# Altium PCB MCU.PcbDoc (part 1 of 2)
Units mm, origin at the board's own origin, x right, y up, seen from the top; angles counter-clockwise.
Board outline 44.5 x 17 mm, 2 copper layers (Top Layer, Bottom Layer), stack 0.871 mm thick; 54 components, 45 nets, 248 pads, 179 vias.
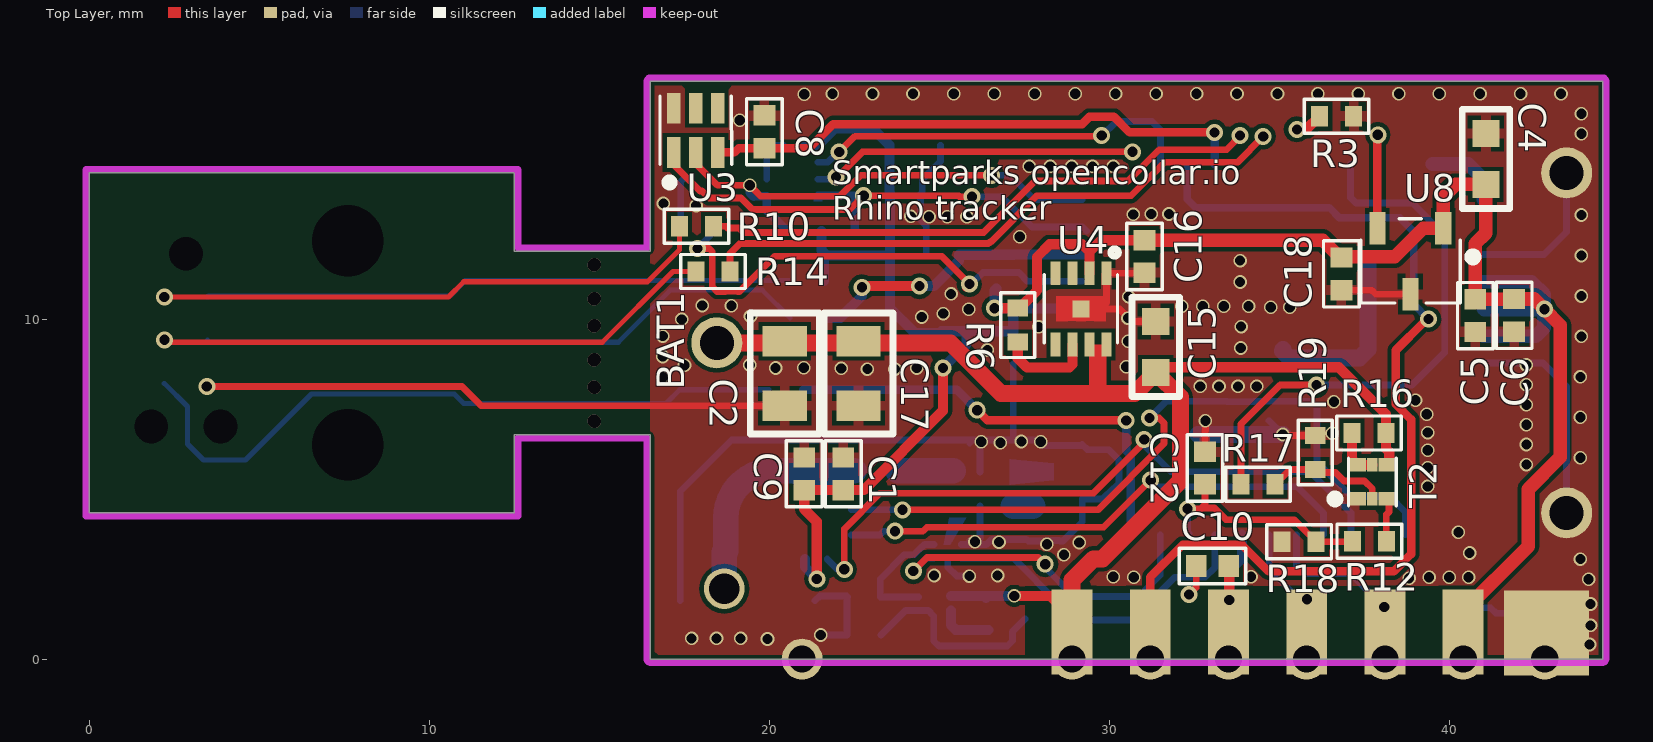
[diagram p0: Top Layer view]
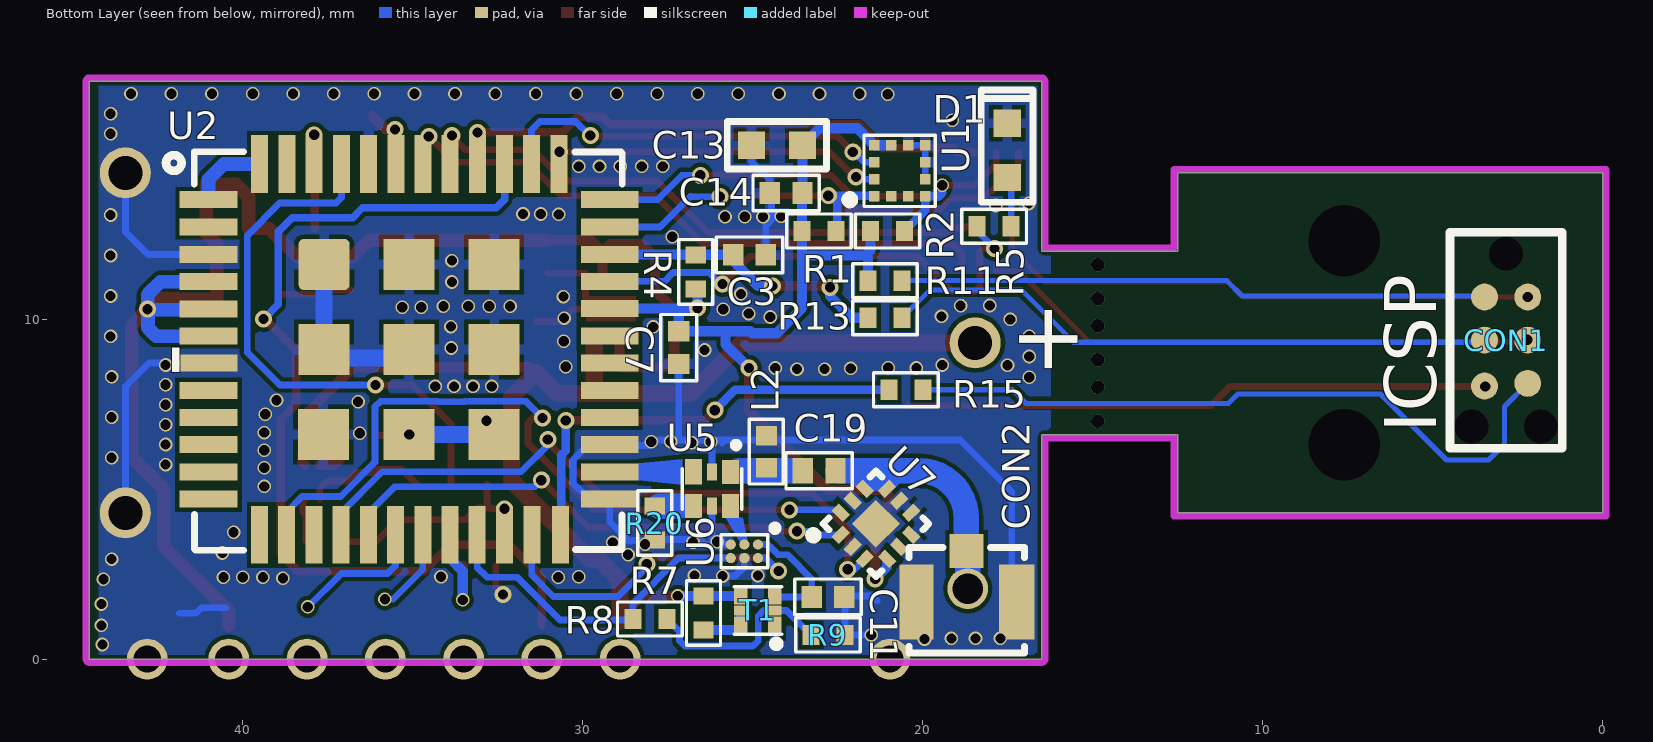
[diagram p1: Bottom Layer view, seen from below]

## Layer stack, top to bottom
Top Solder: solder mask 0.0102, Solder Resist, Dk 3.5
Top Layer: signal copper 0.0356
Dielectric 1: dielectric 0.8, FR-4, Dk 4.8
Bottom Layer: signal copper 0.0356
Bottom Solder: solder mask 0.0102, Solder Resist, Dk 3.5

## Board outline
16.5,0 16.5,4 16.5,5.6 16.5,5.8 16.5,6.6 12.5,6.6 12.5,4.3 0,4.3 0,14.3 12.5,14.3 12.5,12 16.5,12 16.5,12.7 16.5,17 44.5,17 44.5,0

## Design rules (kind name [scope] priority, off if disabled: settings)
Clearance [All] p1: gap=0.127 ignorepadtopadclearanceinfootprint=FALSE
ComponentClearance [All] p1: gap=0.05 collisioncheckmode=3 verticalgap=0.05 showdistances=FALSE
HoleToHoleClearance [All] p1: gap=0.127 allowstackedmicrovias=TRUE
MinimumSolderMaskSliver [All] p1: minsoldermaskwidth=0.05
PolygonConnect [All] p1: thpad.connectstyle=Direct thpad.reliefconductorwidth=0.254 thpad.reliefentries=4 thpad.polygonreliefangle="90 Angle" thpad.airgapwidth=0.254 smdpad.connectstyle=Relief smdpad.reliefconductorwidth=0.3 smdpad.reliefentries=4 smdpad.polygonreliefangle="90 Angle" smdpad.airgapwidth=0.127 via.connectstyle=Direct via.reliefconductorwidth=0.254 via.reliefentries=4 via.polygonreliefangle="90 Angle" via.airgapwidth=0.254
RoutingVias [All] p1: holewidth=0.3 width=0.5 viastyle="Through Hole" minholewidth=0.3 minwidth=0.1 maxholewidth=0.711 maxwidth=1.27
SilkToSilkClearance [All] p1: silktosilkclearance=-10
SilkToSolderMaskClearance [IsPad] p1: minsilkscreentomaskgap=-10 clearancetoexposedcopper=TRUE
SolderMaskExpansion [All] p1: expansion=0.102
Width [All] p1: maxlimit=5 minlimit=0.15 preferedwidth=0.3
25 further rules are at their usual default settings.

## Classes and differential pairs
component class SENSORS: C8 C13 C14 C18 U1 U3 U8
component class MCU: C3 C4 C5 C6 C7 C10 C11 C15 C16 R3 R4 R6 R7 R8 R9 R20 T1 U2 U4 U5 U6
component class MAIN: BAT1 C1 C2 C9 C12 C17 C19 CON1 CON2 D1 L2 R1 R2 R5 R10 R11 R12 R13 R14 R15 R16 R17 R18 R19 T2 U7

## Components (designator, comment, footprint, x,y, rotation, side; value= is the part's Value field where it differs from the comment)
BAT1 "SAFT LS 14250PFR" "SAFT LS 14250PFR" 43.7,9.3 r180 top locked
C1 "100uF" CAP0805 22.62,8.4 r90 top
C2 "100uF" CAP0805 20.45,8.4 r90 top
C3 "100nF" CAP0402#1 25.09,11.89 r0 bottom
C4 "10uF" CAP0603 41.07,14.71 r270 top
C5 "1uF" CAP0402#1 40.76,10.1 r90 top
C6 "100nF" CAP0402#1 41.9,10.11 r90 top
C7 "1uF" CAP0402#1 27.17,9.16 r90 bottom
C8 "1uF" CAP0402#1 19.85,15.51 r90 top
C9 "100nF" CAP0402#1 21.02,5.45 r270 top
C10 "10nF" CAP0402#1 33.03,2.74 r0 top
C11 "100nF" CAP0402#1 22.78,1.83 r180 bottom
C12 "10nF" CAP0402#1 32.81,5.62 r270 top
C13 "10uF" CAP0603 24.28,15.11 r0 bottom
C14 "100nF" CAP0402#1 24.01,13.71 r180 bottom
C15 "4u7/16V" CAP0603 31.36,9.18 r270 top
C16 "2.2uF 6V3" CAP0402#1 31.03,11.84 r90 top
C17 "1uF" CAP0402#1 22.17,5.45 r270 top
C18 "1uF" CAP0402#1 36.82,11.33 r270 top
C19 "1.2pF" CAP0402#2 23.04,5.54 r180 bottom
CON1 "Tag connect" TC2030-IDC-NL 2.835,11.92 r270 bottom locked
CON2 "U.FL-R-SMT-1(10)" "ufl connector smd" 18.85,1.93 r180 bottom
D1 "LED RED" LED0603 17.51,14.96 r270 bottom
L2 "4.7nH" IND0402 24.59,6.1 r270 bottom
R1 "10k" RES0402 23.04,12.59 r0 bottom
R2 "10k" RES0402 21.03,12.59 r0 bottom
R3 "10k" RES0402 36.68,15.97 r0 top
R4 "10k" RES0402 26.67,11.39 r270 bottom
R5 "100R" RES0402 17.89,12.73 r180 bottom
R6 "0R" RES0402 27.3,9.82 r90 top
R7 "100k" RES0402 26.44,1.36 r90 bottom
R8 "100R" RES0402 28.02,1.18 r180 bottom
R9 "100k" RES0402 22.78,0.71 r0 bottom
R10 "100R" RES0402 17.85,12.73 r0 top
R11 "100R" RES0402 21.1,11.13 r180 bottom
R12 "220R" RES0402 37.64,3.47 r0 top
R13 "100R" RES0402 21.1,10.04 r180 bottom
R14 "100R" RES0402 18.34,11.4 r0 top
R15 "100R" RES0402 20.49,7.92 r0 bottom
R16 "100k" RES0402 37.63,6.65 r0 top
R17 "100R" RES0402 34.37,5.14 r0 top
R18 "390R" RES0402 35.58,3.45 r0 top
R19 "100k" RES0402 36.05,6.08 r270 top
R20 "50R" RES0402 27.88,4 r90 bottom
T1 "VT6M1T2CR" VMT6#1 24.84,1.43 r90 bottom value=BSS123
T2 "VT6M1T2CR" VMT6#2 37.73,5.21 r0 top value=BSS123
U1 "LIS2DW12TR" LGA-12 20.67,14.36 r90 bottom
U2 "CMWX1ZZABZ" "Lora Module ES0" 34.76,9.135 r180 bottom
U3 "APDS-9306-065" APDS-9306 17.83,15.55 r0 top
U4 "MCP1810T" VDFN_2x2 29.16,10.3 r180 top
U5 "HHM22106C1" HHM22106C1 26.19,5.005 r0 bottom
U6 "LMH2110TMX" DSBGA-6 25.24,3.17 r270 bottom locked
U7 "PE64102" QFN-12 21.37,3.98 r225 bottom
U8 "DRV5032FBDBZR" SOT23-3AL 38.85,11.7 r270 top

## Footprints (in the part's own frame and the unit in brackets; to place one, negate y for a bottom-side part, rotate by r counter-clockwise, add the part's x,y. Pads: shape width x height; smd on the part's side, far side on the other; paste and mask are expansions set on the pad)
APDS-9306 [mm]
  rect 0.4x0.9 smd: 1(-0.65,-0.65) 2(0,-0.65) 3(0.65,-0.65) 4(0.65,0.65) 5(0,0.65) 6(-0.65,0.65)
  silkscreen extent -1.05,-1.64 1.06,1, body extent -1,-1 1,1, height 0.66
CAP0402#1 [mm] "Chip Capacitor, 2-Leads, Body 1.00x0.50mm, IPC Medium Density"
  rect 0.6x0.64 smd: 1(-0.48,0) 2(0.48,0)
  silkscreen extent -0.97,-0.53 0.97,0.53, body extent -0.55,-0.3 0.55,0.3, height 0.45
CAP0402#2 [mm] "Chip Capacitor, 2-Leads, Body 1.00x0.50mm, IPC Medium Density"
  rect 0.6x0.75 smd: 1(-0.48,0) 2(0.48,0)
  silkscreen extent -0.97,-0.53 0.97,0.53, body extent -0.55,-0.3 0.55,0.3, height 0.45
CAP0603 [mm]
  rect 0.8x0.8 smd: 1(-0.75,0) 2(0.75,0)
  silkscreen extent -1.46,-0.7 1.46,0.7, body extent -0.8,-0.4 0.8,0.4, height 0.9
CAP0805 [mm]
  rect 0.9x1.3 smd: 1(-0.95,0) 2(0.95,0)
  silkscreen extent -1.78,-1.02 1.78,1.02, body extent -1,-0.6 1,0.6, height 1.5
DSBGA-6 [mm]
  round 0.3 smd paste-0.05 mask+0.03: A1(-0.2,0.4) A2(0.2,0.4) B1(-0.2,0) B2(0.2,0) C1(-0.2,-0.4) C2(0.2,-0.4)
  silkscreen extent -0.77,-0.69 0.48,1, body extent -0.44,-0.61 0.44,0.61, height 0.61
HHM22106C1 [mm]
  rect 0.5x0.712 smd mask+0.05: 1(-0.55,-0.5) 4(0.55,0.5) 6(-0.55,0.5)
  rect 0.3x0.5 smd: 2(0,-0.5) 5(0,0.5)
  rect 0.5x0.75 smd mask+0.05: 3(0.55,-0.5)
  silkscreen extent -0.87,-1.37 0.87,0.6, body extent -0.85,-0.47 0.85,0.47, height 0.71
IND0402 [mm] "Chip Inductor, 2-Leads, Body 1.00x0.50mm, IPC Medium Density"
  rect 0.57x0.62 smd: 1(-0.47,0) 2(0.47,0)
  silkscreen extent -0.95,-0.5 0.95,0.5, body extent -0.53,-0.28 0.53,0.28, height 0.55
LED0603 [mm]
  rect 0.8x0.8 smd: 1(-0.8,0) 2(0.8,0)
  silkscreen extent -1.78,-0.76 1.52,0.76, body extent -0.85,-0.4 0.85,0.4, height 0.66
LGA-12 [mm]
  rect 0.3x0.3 smd mask+0.075: 1(-0.75,0.75) 2(-0.75,0.25) 3(-0.75,-0.25) 4(-0.75,-0.75) 5(-0.25,-0.75) 6(0.25,-0.75) 7(0.75,-0.75) 8(0.75,-0.25) 9(0.75,0.25) 10(0.75,0.75) 11(0.25,0.75) 12(-0.25,0.75)
  Top Layer region: -0.615,0.875 -0.89,0.875 -0.89,0.625 -0.703,0.625 -0.615,0.713
  silkscreen extent -1.05,-1.05 1.05,1.59, body extent -1,-1 1,1, height 0.95
"Lora Module ES0" [mm]
  rect 1.7x0.5 smd paste-5: 1(-6.24,4.375) 2(-6.24,3.575) 3(-6.24,2.765) 4(-6.24,1.965) 5(-6.24,1.165) 6(-6.24,0.365) 7(-6.24,-0.425) 8(-6.24,-1.235) 9(-6.24,-2.035) 10(-6.24,-2.825) 11(-6.24,-3.635) 12(-6.24,-4.425) 25(5.562,-4.43) 26(5.562,-3.629) 27(5.562,-2.827) 28(5.562,-2.03) 29(5.562,-1.23) 30(5.562,-0.43) 31(5.56,0.365) 32(5.56,1.175) 33(5.56,1.975) 34(5.56,2.765) 35(5.56,3.575) 36(5.56,4.375)
  rect 0.5x1.7 smd paste-5: 13(-4.74,-5.48) 14(-3.938,-5.48) 15(-3.138,-5.48) 16(-2.338,-5.48) 17(-1.538,-5.48) 18(-0.738,-5.48) 19(0.062,-5.48) 20(0.862,-5.479) 21(1.662,-5.479) 22(2.462,-5.48) 23(3.269,-5.48) 24(4.11,-5.48) 37(4.07,5.425) 38(3.26,5.425) 39(2.47,5.425) 40(1.67,5.425) 41(0.87,5.425) 42(0.07,5.425) 43(-0.73,5.425) 44(-1.53,5.425) 45(-2.33,5.425) 46(-3.13,5.425) 47(-3.93,5.425) 48(-4.74,5.425)
  rrect20% 1.5x1.5 smd paste-0.15: 49(-2.838,2.47)
  rect 1.5x1.5 smd paste-0.15: 50(-0.338,2.47) 51(2.162,2.47) 52(-2.838,-0.03) 53(-0.338,-0.03) 54(2.162,-0.03) 55(-2.863,-2.53) 56(-0.338,-2.53) 57(2.162,-2.53)
  silkscreen extent -7.49,-5.94 5.93,5.78, body extent -6.63,-5.88 5.87,5.72, height 1.76
QFN-12 [mm]
  rect 1x1 smd paste-0.15 mask+0.075: 0(0,0)
  rect 0.3x0.475 smd paste-0.025 mask+0.05: 1(-0.5,-0.962) 2(0,-0.962) 3(0.5,-0.962) 7(0.5,0.962) 8(0,0.962) 9(-0.5,0.962)
  rect 0.475x0.3 smd paste-0.025 mask+0.05: 4(0.963,-0.5) 5(0.963,0) 6(0.963,0.5) 10(-0.962,0.5) 11(-0.962,0) 12(-0.962,-0.5)
  silkscreen extent -1.17,-1.65 1.1,1.1, body extent -1,-1.01 1.01,1.01, height 0.61
RES0402 [mm] "Chip Resistor, 2-Leads, Body 1.00x0.50mm, IPC Medium Density"
  rect 0.5x0.6 smd: 1(-0.5,0) 2(0.5,0)
  silkscreen extent -0.95,-0.5 0.95,0.5, body extent -0.5,-0.25 0.5,0.25, height 0.35
"SAFT LS 14250PFR" [mm]
  round 1.5 hole 1: 1(0.254,5) 1(0.254,-5) 2(25.25,0)
  body extent 0.13,-7.26 25.38,7.24, height 16.45
SOT23-3AL [mm]
  rect 0.95x0.48 smd: 1(-0.97,0.97) 2(-0.97,-0.97) 3(0.97,0)
  silkscreen extent -1.25,-1.46 1.23,1.96, body extent -1.25,-1.46 1.23,1.46, height 0.95
TC2030-IDC-NL [mm] "Tag-Connect 6-Pin with No Legs (PN# TC2030-IDC-NL)"
  round 0.9 hole 0.995 unplated: 0(0,0) 0(5.08,-1.016) 0(5.08,1.016)
  round 0.79 smd paste-0.39: 1(1.27,-0.635) 2(1.27,0.635) 3(2.54,-0.635) 4(2.54,0.635) 5(3.89,-0.635) 6(3.81,0.635)
  silkscreen extent -0.64,-1.65 5.71,1.65
"ufl connector smd" [mm]
  rect 1x1 smd: 1(0.15,1.248)
  rect 1x2.2 smd: 2(-1.325,-0.252)
  rect 1.05x2.2 smd: 2(1.625,-0.252)
  silkscreen extent -1.55,-1.75 1.85,1.35, body extent -1.55,-1.67 1.85,1.43, height 1.25
VDFN_2x2 [mm]
  rect 0.5x0.5 smd: 0(0,0)
  rect 0.3x0.7 smd mask+0.075: 1(-0.75,-1.05) 2(-0.25,-1.05) 3(0.25,-1.05) 4(0.75,-1.05) 5(0.75,1.05) 6(0.25,1.05) 7(-0.25,1.05) 8(-0.75,1.05)
  Top Layer region: 0.73,-0.37 0.731,0.37 -0.725,0.37 -0.725,-0.37
  silkscreen extent -1.07,-1 1.08,1, body extent -1,-1 1,1.01, height 0.86
VMT6#1 [mm]
  rect 0.5x0.4 smd paste-0.07 mask+0.04: 1(-0.43,-0.5) 3(0.43,-0.5) 4(0.43,0.5) 6(-0.43,0.5)
  rect 0.3x0.4 smd mask+0.05: 2(0,-0.5) 5(0,0.5)
  silkscreen extent -1.07,-0.7 0.7,0.7, body extent -0.6,-0.6 0.6,0.6, height 0.55
VMT6#2 [mm]
  rect 0.5x0.4 smd paste-0.07 mask+0.025: 1(-0.43,-0.5) 3(0.43,-0.5) 4(0.43,0.5) 6(-0.43,0.5)
  rect 0.3x0.4 smd mask+0.05: 2(0,-0.5) 5(0,0.5)
  silkscreen extent -1.22,-0.7 0.7,0.7, body extent -0.6,-0.6 0.6,0.6, height 0.55

## Part data
BAT1: library part "BAT - SAFT LS 14250PFR", "Battery: lithium; 3.6V; 1/2AA; 3pin,positive pole: 1pin; 1200mAh", Supplier Part Number 1=SAFT-LS14250PFR, Supplier 1=TME
C1 C2: library part "C - 100uF/0805", "Multilayer Ceramic Capacitors MLCC - SMD/SMT 0805 100uF 4volts *Derate Voltage/Temp", Case/Package=0805, Case Code (Metric)=2012, Dielectric=X5R, Dielectric Material=Ceramic, IRNAS Part No.=/, Manufacturer=Murata, Manufacturer Part Number=GRM21BR60G107ME15L, Max Operating Temperature=85°C, Min Operating Temperature=-55°C, Package Quantity=3000, Supplier Part Number 1=2611937, Tolerance=20%, Voltage=4V, Capacitance=100uF, Case Code (Imperial)=0805, ComponentLink1Description=http://www.farnell.com/datasheets/2079181.pdf, ComponentLink1URL=http://www.farnell.com/datasheets/2079181.pdf, ComponentLink2Description=http://search.murata.co.jp/Ceramy/image/img/A01X/partnumbering_e_01.pdf, ComponentLink2URL=http://search.murata.co.jp/Ceramy/image/img/A01X/partnumbering_e_01.pdf, ComponentLink3Description=http://psearch.en.murata.com/capacitor/product/GRM21BR60G107ME15%23.pdf, ComponentLink3URL=http://psearch.en.murata.com/capacitor/product/GRM21BR60G107ME15%23.pdf, ComponentLink4Description=http://www.mouser.com/ds/2/281/c02e-2905.pdf, ComponentLink4URL=http://www.mouser.com/ds/2/281/c02e-2905.pdf, Depth=1.25mm, Dissipation Factor=0.1%, Height=1.25mm, Lead Free="Lead Free", Length=2mm, Mount="Surface Mount", Packaging="Tape and Reel", Pricing 1="5=0.775, 50=0.463, 250=0.405, 500=0.289, 1500=0.243, 3000=0.229, 15000=0.21 (GBP)", REACH SVHC="No SVHC", Stock 1=529, Supplier 1=Farnell, Termination=SMD/SMT, Thickness=0.057inch, Voltage Rating=4V, Voltage Rating (DC)=4V, Weight=0.000335oz, Width=0.049inch
C3 C6 C9 C11 C14: library part "C - 100nF/0402", "MULTICOMP         MC0402X104J160CT             SMD Multilayer Ceramic Capacitor, 0402 [1005 Metric], 0.1 F, 16 V,  5%, X5R, MC Series                          New", Case Code (Imperial)=0402, Case Code (Metric)=1005, Dielectric=X5R, IRNAS Part No.=/, Manufacturer=Multicomp, Manufacturer Part Number=MC0402X104J160CT, Max Operating Temperature=85°C, Min Operating Temperature=-55°C, Supplier Part Number 1=2627419, Tolerance=5%, Voltage Rating=16V, Capacitance=100nF, ComponentLink1Description=http://www.farnell.com/datasheets/2117933.pdf, ComponentLink1URL=http://www.farnell.com/datasheets/2117933.pdf, ComponentLink2Description=http://www.farnell.com/datasheets/2117900.pdf, ComponentLink2URL=http://www.farnell.com/datasheets/2117900.pdf, Packaging="Tape and Reel", Pricing 1="10=0.0139, 100=0.0108, 500=0.0076, 2500=0.0051, 5000=0.0038 (EUR)", REACH SVHC="No SVHC", Stock 1=3230, Supplier 1=Farnell, Voltage Rating (DC)=16V
C4: "10uf/0603/20%", Manufacturer=KEMET, Manufacturer Part Number=C0603C106M8PACTU, Supplier Part Number 1=2456110, Pricing 1="10=0.555, 100=0.315, 500=0.238, 1000=0.2, 2000=0.174, 4000=0.143, 20000=0.123 (GBP)", Stock 1=0, Supplier 1=Farnell
C5 C7 C8 C17 C18: library part "C - 1uF/0402", "CAP CER 1UF 10V 20% X5R 0402", Case/Package=0402, Case Code (Metric)=1005, Dielectric=X5R, IRNAS Part No.=/, Manufacturer=Murata, Manufacturer Part Number=GRM155R61A105ME15D, Max Operating Temperature=85°C, Min Operating Temperature=-55°C, Package Quantity=1, Supplier Part Number 1=1740588, Tolerance=20%, Voltage=10V, Capacitance=1uF, Case Code (Imperial)=0402, ComponentLink1Description=https://datasheet.ciiva.com/164/product-164665.pdf, ComponentLink1URL=https://datasheet.ciiva.com/164/product-164665.pdf, ComponentLink2Description=https://datasheet.ciiva.com/11616/product-11616508.pdf, ComponentLink2URL=https://datasheet.ciiva.com/11616/product-11616508.pdf, ComponentLink3Description=https://datasheet.ciiva.com/46418/1769893-46418047.pdf, ComponentLink3URL=https://datasheet.ciiva.com/46418/1769893-46418047.pdf, ComponentLink4Description=https://datasheet.ciiva.com/164/partnumbering-e-01-164666.pdf, ComponentLink4URL=https://datasheet.ciiva.com/164/partnumbering-e-01-164666.pdf, ComponentLink5Description=https://datasheet.ciiva.com/164/partnumbering-e-01-164667.pdf, ComponentLink5URL=https://datasheet.ciiva.com/164/partnumbering-e-01-164667.pdf, Depth=0.5mm, Height=0.5mm, Lead Free="Lead Free", Length=1mm, Mount="Surface Mount", Packaging="Tape and Reel", Pricing 1="10=0.0379, 100=0.0266, 500=0.0156, 2500=0.0098, 5000=0.0083 (EUR)", Radiation Hardening=No, REACH SVHC="No SVHC", Stock 1=0, Supplier 1=Farnell, Thickness=0.022inch, Voltage Rating=10V, Voltage Rating (DC)=10V, Width=0.02inch
C10 C12: library part "C - 10nF/0402", "CAP CER 10000PF 16V X7R 0402", Case/Package=0402, Case Code (Metric)=1005, Dielectric=X7R, IRNAS Part No.=/, Manufacturer=Murata, Manufacturer Part Number=GRM155R71C103KA01D, Max Operating Temperature=125°C, Min Operating Temperature=-55°C, Package Quantity=1, Supplier Part Number 1=2407354, Tolerance=10%, Voltage=16V, Capacitance=10nF, Case Code (Imperial)=0402, ComponentLink1Description=https://datasheet.ciiva.com/129/partnumbering-e-01-129774.pdf, ComponentLink1URL=https://datasheet.ciiva.com/129/partnumbering-e-01-129774.pdf, ComponentLink2Description=https://datasheet.ciiva.com/129/partnumbering-e-01-129775.pdf, ComponentLink2URL=https://datasheet.ciiva.com/129/partnumbering-e-01-129775.pdf, ComponentLink3Description=https://datasheet.ciiva.com/129/product-129776.pdf, ComponentLink3URL=https://datasheet.ciiva.com/129/product-129776.pdf, ComponentLink4Description=https://datasheet.ciiva.com/18184/getdatasheetpartid-178863-18184649.pdf, ComponentLink4URL=https://datasheet.ciiva.com/18184/getdatasheetpartid-178863-18184649.pdf, ComponentLink5Description=https://datasheet.ciiva.com/22698/608985-22698415.pdf, ComponentLink5URL=https://datasheet.ciiva.com/22698/608985-22698415.pdf, ComponentLink6Description=https://datasheet.ciiva.com/7937/608985-7937614.pdf, ComponentLink6URL=https://datasheet.ciiva.com/7937/608985-7937614.pdf, Depth=0.5mm, Height=0.5mm, Lead Free="Lead Free", Length=1mm, Mount="Surface Mount", Number of Pins=2, Packaging="Tape and Reel", Pricing 1="10=0.0216, 100=0.0151, 500=0.0104, 2500=0.0069, 5000=0.0056 (EUR)", Radiation Hardening=No, REACH SVHC="No SVHC", Stock 1=16478, Supplier 1=Farnell, Termination=SMD/SMT, Thickness=0.022inch, Voltage Rating=16V, Voltage Rating (DC)=16V, Width=0.02inch
C13: library part "C - 10uF/10V", "Cap Ceramic 10uF 10V X5R 10% SMD 0603 85C Paper T/R", Case/Package=0603, Case Code (Metric)=1608, Dielectric=X5R, IRNAS Part No.=/, Manufacturer=Samsung, Manufacturer Part Number=CL10A106KP8NNNC, Max Operating Temperature=85°C, Min Operating Temperature=-55°C, Package Quantity=1, Supplier Part Number 1=2456110, Tolerance=10%, Voltage Rating=10V, Capacitance=10uF, Case Code (Imperial)=0603, ComponentLink1Description=https://www.verical.com/server-webapp/html/getDatasheet?partID=359551, ComponentLink1URL=https://www.verical.com/server-webapp/html/getDatasheet?partID=359551, ComponentLink2Description=http://www1.futureelectronics.com/doc/SAMSUNG%20PASSIVE/CL05B104KQ5NNNC.pdf, ComponentLink2URL=http://www1.futureelectronics.com/doc/SAMSUNG%20PASSIVE/CL05B104KQ5NNNC.pdf, ComponentLink3Description=https://produktinfo.conrad.com/datenblaetter/450000-474999/457369-da-01-en-VS_KONDENSATOR_0603.pdf, ComponentLink3URL=https://produktinfo.conrad.com/datenblaetter/450000-474999/457369-da-01-en-VS_KONDENSATOR_0603.pdf, Contact Plating=Tin, Depth=0.8mm, Height=0.8mm, Lead Free="Lead Free", Length=1.6mm, Material=Ceramic, Mount="Surface Mount", Packaging="Tape and Reel", Pricing 1="1=0.36, 10=0.248, 100=0.1403, 500=0.099, 1000=0.08663 (USD)", Radiation Hardening=No, Stock 1=2844657, Supplier 1=Farnell, Thickness=0.035inch, Voltage Rating (DC)=10V, Width=0.031inch
C15: library part "C - 4u7  16V 0603", "MURATA - GRM188R61C475KAAJD - CAP, MLCC, X5R, 4.7UF, 16V, 0603", Capacitance=4.7, Capacitance Tolerance="± 10%", Ceramic Capacitor Case="0603 [1608 Metric]", Dielectric Characteristic=X5, IRNAS Part No.=I-200001, Manufacturer=MURATA, Manufacturer Part Number=GRM188R61C475KAAJD, Operating Temperature Max=85, Operating Temperature Min=-55, Supplier Part Number 1=2611924, Voltage Rating=16, Automotive Qualification Standard=-, ComponentLink1Description=http://www.farnell.com/datasheets/2079168.pdf, ComponentLink1URL=http://www.farnell.com/datasheets/2079168.pdf, MSL="MSL 1 - Unlimited", Packaging="Cut Tape", Pricing 1="10=0.16, 100=0.0929, 500=0.076, 1000=0.0618, 2000=0.0605, 4000=0.0425, 20000=0.0409, 40000=0.0355 (GBP)", Product Range="GRM Series", RoHS=YES, Stock 1=5038, Supplier 1=Farnell, SVHC="No SVHC (17-Dec-2015)<!--FANDB--><div class=\"features-and-benefits-container\"><div class=\"features-and-benefits-desc-container\"><span class=\"features-and-benefits-container-desc\">SMD Multilayer Ceramic Capacitor, 0603 [1608 Metric], 4.7 µF, 16 V, ± 10%, X5"
C16: library part "C - 2.2uF/6V3/0402", "CAP CER 2.2UF 6.3V 20% X5R 0402", Capacitance=2.2uF, Case/Package=0402, Case Code (Metric)=1005, Dielectric=X5R, IRNAS Part No.=/, Manufacturer=Murata, Manufacturer Part Number=GRM155R60J225ME15D, Max Operating Temperature=85°C, Min Operating Temperature=-55°C, Package Quantity=10000, Supplier Part Number 1=2362088, Tolerance=20%, Voltage=6.3V, Case Code (Imperial)=0402, ComponentLink1Description=https://datasheet.ciiva.com/29149/450128-da-01-de-vs-kondens-grm155-r60j-225me15d-29149006.pdf, ComponentLink1URL=https://datasheet.ciiva.com/29149/450128-da-01-de-vs-kondens-grm155-r60j-225me15d-29149006.pdf, ComponentLink2Description=https://datasheet.ciiva.com/46418/1754686-46418042.pdf, ComponentLink2URL=https://datasheet.ciiva.com/46418/1754686-46418042.pdf, ComponentLink3Description=https://datasheet.ciiva.com/17454/c02e-17454956.pdf, ComponentLink3URL=https://datasheet.ciiva.com/17454/c02e-17454956.pdf, ComponentLink4Description=https://datasheet.ciiva.com/235/partnumbering-e-01-235009.pdf, ComponentLink4URL=https://datasheet.ciiva.com/235/partnumbering-e-01-235009.pdf, ComponentLink5Description=https://datasheet.ciiva.com/2989/c02e-2989361.pdf, ComponentLink5URL=https://datasheet.ciiva.com/2989/c02e-2989361.pdf, ComponentLink6Description=https://datasheet.ciiva.com/235/partnumbering-e-01-235010.pdf, ComponentLink6URL=https://datasheet.ciiva.com/235/partnumbering-e-01-235010.pdf, ComponentLink7Description=https://datasheet.ciiva.com/235/partnumbering-e-01-235011.pdf, ComponentLink7URL=https://datasheet.ciiva.com/235/partnumbering-e-01-235011.pdf, Depth=0.5mm, Height=0.5mm, Lead Free="Lead Free", Length=1mm, Material=Ceramic, Mount="Surface Mount", Packaging="Tape and Reel", Pricing 1="10=0.118, 100=0.0494, 500=0.031, 2500=0.0213, 5000=0.0163 (EUR)", Radiation Hardening=No, REACH SVHC="No SVHC", Stock 1=0, Supplier 1=Farnell, Termination=SMD/SMT, Thickness=0.022inch, Voltage Rating=6.3V, Voltage Rating (DC)=6.3V, Width=0.02inch
C19: library part "C - 4.7nF/0402", "CAP CER 4700PF 50V X7R 0402", Capacitance=4.7nF, Case/Package=0402, Case Code (Metric)=1005, Dielectric=X7R, Dielectric Material=Ceramic, IRNAS Part No.=/, Manufacturer=KEMET, Manufacturer Part Number=C0402C472K5RAC-TU, Max Operating Temperature=125°C, Min Operating Temperature=-55°C, Package Quantity=1, Supplier Part Number 1=1414594, Tolerance=10%, Voltage=50V, Case Code (Imperial)=0402, ComponentLink1Description=https://datasheet.ciiva.com/7747/40889-7747549.pdf, ComponentLink1URL=https://datasheet.ciiva.com/7747/40889-7747549.pdf, ComponentLink2Description=https://datasheet.ciiva.com/7747/40889-7747550.pdf, ComponentLink2URL=https://datasheet.ciiva.com/7747/40889-7747550.pdf, ComponentLink3Description=https://datasheet.ciiva.com/14604/70095383-14604382.pdf, ComponentLink3URL=https://datasheet.ciiva.com/14604/70095383-14604382.pdf, ComponentLink4Description=https://datasheet.ciiva.com/6074/kem-c1002-x7r-smd-6074645.pdf, ComponentLink4URL=https://datasheet.ciiva.com/6074/kem-c1002-x7r-smd-6074645.pdf, ComponentLink5Description=https://datasheet.ciiva.com/14602/70095383-14602057.pdf, ComponentLink5URL=https://datasheet.ciiva.com/14602/70095383-14602057.pdf, ComponentLink6Description=https://datasheet.ciiva.com/18102/getdatasheetpartid-63228-18102058.pdf, ComponentLink6URL=https://datasheet.ciiva.com/18102/getdatasheetpartid-63228-18102058.pdf, Depth=0.5mm, Height=0.5mm, Lead Pitch=0.3mm, Length=1mm, Mount="Surface Mount,PCB", Number of Pins=2, Packaging="Tape and Reel", Pricing 1="10=0.0321, 100=0.0144, 500=0.0081, 2500=0.0057, 5000=0.0048 (EUR)", Radiation Hardening=No, REACH SVHC="No SVHC", Stock 1=98953, Supplier 1=Farnell, Termination=SMD/SMT, Thickness=0.022inch, Voltage Rating=50V, Voltage Rating (DC)=50V, Width=0.02inch
CON1: library part "tag connecot 6 pin"
CON2: "RF / Coaxial Connector, U.FL Coaxial, Straight Jack, Surface Mount Vertical, 50 ohm, Brass", Dielectric Material="Liquid Crystal Polymer (LCP)", Frequency - Max=6GHz, Housing Color=Beige, Manufacturer=Hirose, Operating Temperature="-40°C ~ 90°C", Standard Package=2,500, Supplier Part Number 1=1688077, Voltage Rating=-, Body Finish=Silver, Body Material="Phosphor Bronze", Cable Group=-, Category="Connectors, Interconnects", Center Contact Material=Brass, Center Contact Plating=Gold, ComponentLink1Description=http://www.farnell.com/datasheets/91524.pdf, ComponentLink1URL=http://www.farnell.com/datasheets/91524.pdf, ComponentLink2Description=http://uk.rs-online.com/webdocs/1363/0900766b81363563.pdf, ComponentLink2URL=http://uk.rs-online.com/webdocs/1363/0900766b81363563.pdf, ComponentLink3Description=http://www.farnell.com/datasheets/1947917.pdf, ComponentLink3URL=http://www.farnell.com/datasheets/1947917.pdf, Connector Style="U.FL, Ultra Miniature Coaxial", Connector Type="Receptacle, Male Pin", Contact Termination=Solder, Family="Coaxial Connectors (RF)", Fastening Type=Snap-On, Featured Product="U.FL Series Connectors", Features=-, Impedance="50 Ohm", Ingress Protection=-, Manufacturer Part Number=U.FL-R-SMT-1(10), Mounting Type="Surface Mount", Online Catalog="UMCC (Ultra Miniature Coax Connectors), U.FL Series", Other Names="H11891TR  Q5400621  U.FL-R-SMT-1 10  U.FL-R-SMT-1(10)-ND  UFLRSMT110", Packaging="Tape & Reel (TR)", Series=U.FL, Shield Termination=Solder, Stock 1=0, Supplier 1=Farnell
D1: library part "LED - LED RED", "BROADCOM LIMITED - HSMS-C190 - LED, RED, 10MCD, 626NM", Forward Current If=20, Forward Voltage=2.1, LED Colour=Red, Manufacturer="BROADCOM LIMITED", Manufacturer Part Number=HSMS-C190, Supplier Part Number 1=2497356, Automotive Qualification Standard=-, Bulb Size=-, ComponentLink1Description=http://www.farnell.com/datasheets/313031.pdf, ComponentLink1URL=http://www.farnell.com/datasheets/313031.pdf, ComponentLink2Description=http://www.farnell.com/datasheets/1681524.pdf, ComponentLink2URL=http://www.farnell.com/datasheets/1681524.pdf, ComponentLink3Description=http://www.farnell.com/datasheets/2165483.pdf, ComponentLink3URL=http://www.farnell.com/datasheets/2165483.pdf, LED Mounting=SMD, Lens Shape=Rectangular, Luminous Intensity=10, MSL=-, Packaging="Cut Tape", Pricing 1="1=0.361, 10=0.256, 50=0.235, 100=0.106, 200=0.101 (GBP)", Product Range=-, RoHS=YES, Stock 1=7534, Supplier 1=Farnell, SVHC="No SVHC (17-Dec-2015)<!--FANDB--><div class=\"features-and-benefits-container\"><div class=\"features-and-benefits-description\"><span class=\"features-benefits-value\">The HSMS-C190 is a HER SMD Chip LED with untinted/diffused lens, made of GaP. It is designed in an industry standard package 1.6 x 0.8mm footprint with 0.8mm profile. It is compatible with IR reflow solder processes. The small size and wide viewing angle make this LED prime choices for backlighting applications and front panel illumination especially where space is a premium.</span></div><div class=\"features-and-benefits-list\"><ul class=\"features-and-benefits-list-list\"><li class=\"features-and-benefits-list-item\">Small size</li><li class=\"features-and-benefits-list-item\">Industry standard footprint</li><li class=\"features-and-benefits-list-item\">Compatible with IR solder</li><li class=\"features-and-benefits-list-item\">Diffused optics</li><li class=\"features-and-benefits-list-item\">-40 to 85", Viewing Angle=170°, Wavelength Typ=626
L2: library part "L - 4.3nH/0402", "Inductor RF Chip Multi-Layer 4.3nH 0.3nH 100MHz 8Q-Factor Air 300mA 210mOhm DCR 0402 Paper T/R", Case/Package=0402, Case Code (Metric)=1005, Current=300mA, DC Resistance (DCR)=210mR, Inductance=4.3nh, IRNAS Part No.=/, Manufacturer=Murata, Manufacturer Part Number=LQG15HN4N3S02D, Max Operating Temperature=125°C, Min Operating Temperature=-55°C, Package Quantity=10000, Self Resonant Frequency=6GHz, Supplier Part Number 1=1711735, Test Frequency=100MHz, Case Code (Imperial)=0402, ComponentLink1Description=http://uk.rs-online.com/webdocs/0f10/0900766b80f10808.pdf?src-supplier=RSComponents, ComponentLink1URL=http://uk.rs-online.com/webdocs/0f10/0900766b80f10808.pdf?src-supplier=RSComponents, ComponentLink2Description=http://search.murata.co.jp/Ceramy/image/img/PDF/ENG/L0075S0083LQG15HN.pdf?src-supplier=Avnet, ComponentLink2URL=http://search.murata.co.jp/Ceramy/image/img/PDF/ENG/L0075S0083LQG15HN.pdf?src-supplier=Avnet, ComponentLink3Description=http://www.farnell.com/datasheets/66026.pdf?src-supplier=Element14, ComponentLink3URL=http://www.farnell.com/datasheets/66026.pdf?src-supplier=Element14, ComponentLink4Description=https://www.verical.com/server-webapp/html/getDatasheet?partID=31252&src-supplier=Verical, ComponentLink4URL=https://www.verical.com/server-webapp/html/getDatasheet?partID=31252&src-supplier=Verical, ComponentLink5Description=http://search.murata.co.jp/Ceramy/image/img/PDF/ENG/L0075S0083LQG15HN.pdf?src-supplier=Avnet+Europe, ComponentLink5URL=http://search.murata.co.jp/Ceramy/image/img/PDF/ENG/L0075S0083LQG15HN.pdf?src-supplier=Avnet+Europe, ComponentLink6Description=https://search.murata.co.jp/Ceramy/image/img/P02/partnumberingAT_LQ3E.pdf?src-supplier=Digi-Key, ComponentLink6URL=https://search.murata.co.jp/Ceramy/image/img/P02/partnumberingAT_LQ3E.pdf?src-supplier=Digi-Key, Core Material=Air, Current Rating=300mA, DC Current=300mA, Depth=0.55mm, Height=0.5mm, Height - Seated (Max)=0.022inch, Lead Free="Lead Free", Length=1.05mm, Max DC Current=300mA, Military Standard=Not, Mount="Surface Mount", Packaging="Tape and Reel", Pricing 1="1 = 0.10000, 10 = 0.06100, 100 = 0.04040, 500 = 0.03366, 1000 = 0.02827, 2500 = 0.02423 (USD)", Q Factor=8, Radiation Hardening=No, REACH SVHC="No SVHC", RoHS=Yes, Shielding=Unshielded, Stock 1=3502, Supplier 1=Farnell, Termination=SMD/SMT, Width=0.02inch
R1 R2 R3 R4: library part "R - 10k/0402", "MULTICOMP         MCWR04X1002FTL             SMD Chip Resistor, Thick Film, 10 kohm, 50 V, 0402 [1005 Metric], 62.5 mW,  1%, MCWR Series", Case/Package=0402, Case Code (Metric)=1005, IRNAS Part No.=I-100014, Manufacturer=Multicomp, Manufacturer Part Number=MCWR04X1002FTL, Power Rating=62.5mW, Resistance=10kR, Supplier Part Number 1=2447096, Temperature Coefficient=100ppm/°C, Tolerance=1%, Voltage Rating=50V, Case Code (Imperial)=0402, ComponentLink1Description=http://www.farnell.com/datasheets/1849611.pdf, ComponentLink1URL=http://www.farnell.com/datasheets/1849611.pdf, Composition="Thick Film", Packaging="Cut Tape", Pricing 1="10=0.0029, 100=0.0017, 500=0.0012, 2500=0.001, 5000=0.0008 (EUR)", REACH SVHC="No SVHC", Stock 1=602609, Supplier 1=Farnell, Voltage Rating (DC)=50V
R5 R8 R10 R11 R13 R14 R15 R17: library part "R - 100R/0402", "MULTICOMP         MCMR04X1000FTL            SMD Chip Resistor, Ceramic, MCMR Series, 100 ohm, 50 V, 0402 [1005 Metric], 62.5 mW,  1%", Case/Package=0402, Case Code (Metric)=1005, IRNAS Part No.=/, Manufacturer=Multicomp, Manufacturer Part Number=MCMR04X1000FTL, Power Rating=62.5mW, Supplier Part Number 1=2072515, Temperature Coefficient=100ppm/°C, Tolerance=1%, Voltage Rating=50V, Case Code (Imperial)=0402, ComponentLink1Description=https://datasheet.ciiva.com/28692/1716705-28692087.pdf, ComponentLink1URL=https://datasheet.ciiva.com/28692/1716705-28692087.pdf, ComponentLink2Description=https://datasheet.ciiva.com/22708/1716705-22708156.pdf, ComponentLink2URL=https://datasheet.ciiva.com/22708/1716705-22708156.pdf, Composition=Ceramic, Packaging="Cut Tape", Pricing 1="10=0.0071, 100=0.0042, 500=0.003, 2500=0.0024, 5000=0.0019 (GBP)", REACH SVHC="No SVHC", Resistance=100R, Stock 1=62365, Supplier 1=Farnell, Voltage Rating (DC)=50V
R6: library part "R - 0R/0402", "RESISTOR, 0402, 0R, ANTI SULFURATION", Case/Package=0402, Case Code (Metric)=1005, IRNAS Part No.=I-100016, Manufacturer=Multicomp, Manufacturer Part Number=MCMR04X000PTL, Power Rating=62.5mW, Resistance=0mR, Supplier Part Number 1=2072513, Temperature Coefficient=400ppm/°C, Voltage Rating=50V, Case Code (Imperial)=0402, ComponentLink1Description=https://datasheet.ciiva.com/7776/1716705-7776974.pdf, ComponentLink1URL=https://datasheet.ciiva.com/7776/1716705-7776974.pdf, ComponentLink2Description=https://datasheet.ciiva.com/28677/1716705-28677161.pdf, ComponentLink2URL=https://datasheet.ciiva.com/28677/1716705-28677161.pdf, Composition=Ceramic, Packaging="Cut Tape", Pricing 1="10=0.0057, 100=0.0034, 500=0.0024, 2500=0.0019, 5000=0.0015 (EUR)", REACH SVHC="No SVHC", Stock 1=0, Supplier 1=Farnell, Voltage Rating (DC)=50V
R7 R9 R16 R19: library part "R - 100k/0402", "MULTICOMP   MCWR04X1003FTL   RES, THICK FILM, 100KOHM, 1%, 0.0625W", Case/Package=0402, Case Code (Metric)=1005, IRNAS Part No.=I-100013, Manufacturer=Multicomp, Manufacturer Part Number=MCWR04X1003FTL, Power Rating=62.5mW, Resistance=100kR, Supplier Part Number 1=2447094, Temperature Coefficient=100ppm/°C, Tolerance=1%, Voltage Rating=50V, Case Code (Imperial)=0402, ComponentLink1Description=https://datasheet.ciiva.com/46386/1849611-46386524.pdf, ComponentLink1URL=https://datasheet.ciiva.com/46386/1849611-46386524.pdf, Composition="Thick Film", Mount="Surface Mount", Packaging="Cut Tape", Pricing 1="10=0.0029, 100=0.0017, 500=0.0012, 2500=0.001, 5000=0.0008 (EUR)", REACH SVHC="No SVHC", Stock 1=161188, Supplier 1=Farnell, Voltage Rating (DC)=50V
R12: library part "R - 220R/0402", "SMD Chip Resistor, 0402 [1005 Metric], 220 ohm, CRCW e3 Series, 50 V, Thick Film, 63 mW", Case/Package=0402, Case Code (Metric)=1005, IRNAS Part No.=/, Manufacturer=Multicomp, Power Rating=62.5mW, Supplier Part Number 1=2140704, Temperature Coefficient=400ppm/°C, Voltage Rating=50V, Case Code (Imperial)=0402, ComponentLink1Description=Datasheet, ComponentLink1URL=http://www.farnell.com/datasheets/2310790.pdf?_ga=2.80708247.1822379758.1564985606-1373726713.1554121096&_gac=1.157944520.1562763802.CjwKCAjwmZbpBRAGEiwADrmVXm8xT8OHDZvJe8qZIQyyGmIuiUD-TEITatw0hIdDkyBwIXXCH7oneRoCl7cQAvD_BwE, Composition=Ceramic, Packaging="Cut Tape", Pricing 1="10=0.0057, 100=0.0034, 500=0.0024, 2500=0.0019, 5000=0.0015 (EUR)", REACH SVHC="No SVHC", Resistance=220R, Stock 1=0, Supplier 1=Farnell, Voltage Rating (DC)=50V
R18: library part "R - 390R/0402", "SMD Chip Resistor, 0402 [1005 Metric], 390 ohm, MCWR Series, 50 V, Thick Film, 62.5 mW", Case/Package=0402, Case Code (Metric)=1005, IRNAS Part No.=/, Manufacturer=Multicomp, Power Rating=62.5mW, Supplier Part Number 1=2447165, Temperature Coefficient=400ppm/°C, Voltage Rating=50V, Case Code (Imperial)=0402, ComponentLink1Description=Datasheet, ComponentLink1URL=http://www.farnell.com/datasheets/2563624.pdf?_ga=2.57959210.1822379758.1564985606-1373726713.1554121096&_gac=1.48955732.1562763802.CjwKCAjwmZbpBRAGEiwADrmVXm8xT8OHDZvJe8qZIQyyGmIuiUD-TEITatw0hIdDkyBwIXXCH7oneRoCl7cQAvD_BwE, Composition=Ceramic, Packaging="Cut Tape", Pricing 1="10=0.0057, 100=0.0034, 500=0.0024, 2500=0.0019, 5000=0.0015 (EUR)", REACH SVHC="No SVHC", Resistance=390R, Stock 1=0, Supplier 1=Farnell, Voltage Rating (DC)=50V
R20: library part "R - 50R", "SMD Chip Resistor, 0402 [1005 Metric], 50 ohm, FC Series, 30 V, Thin Film, 50 mW", Case/Package=0603, Case Code (Metric)=1608, IRNAS Part No.=/, Manufacturer=Vishay, Manufacturer Part Number=CRCW060351R0FKEA, Max Operating Temperature=155°C, Max Power Dissipation=100mW, Min Operating Temperature=-55°C, Package Quantity=10, Resistance=51R, Supplier Part Number 1=2309101, Temperature Coefficient=100ppm/°C, Tolerance=1%, Voltage Rating=75V, Case Code (Imperial)=0603, ComponentLink11Description=Datasheet, ComponentLink11URL=http://www.farnell.com/datasheets/2045976.pdf?_ga=2.23751994.1451481302.1563774341-1373726713.1554121096&_gac=1.92491119.1562763802.CjwKCAjwmZbpBRAGEiwADrmVXm8xT8OHDZvJe8qZIQyyGmIuiUD-TEITatw0hIdDkyBwIXXCH7oneRoCl7cQAvD_BwE, Composition="Thick Film", Contact Plating=Tin, Depth=0.85mm, Height=0.45mm, Lead Free="Lead Free", Length=1.55mm, Military Standard=Not, Number of Pins=2, Number of Terminations=2, Packaging="Tape and Reel", Power Rating=100mW, Pricing 1="10=0.0116, 250=0.0087, 500=0.0059, 1250=0.0052, 2500=0.0046 (GBP)", Radiation Hardening=No, REACH SVHC=Unknown, Stock 1=1083, Supplier 1=Farnell, Termination=SMD/SMT, Voltage Rating (DC)=75V, Weight=7.1E-05oz, Width=0.85mm, Working Voltage=75V
T1 T2: library part "T_M - VT6M1T2CR", "Dual MOSFET, N and P Channel, 100 mA, 20 V, 2.5 ohm, 4.5 V, 1 V", Supplier Part Number 1=2706721, Author="Ciril Golob", ComponentLink1Description=Datasheet, ComponentLink1URL=http://www.farnell.com/datasheets/2198041.pdf?_ga=2.191543850.1451481302.1563774341-1373726713.1554121096&_gac=1.95045230.1562763802.CjwKCAjwmZbpBRAGEiwADrmVXm8xT8OHDZvJe8qZIQyyGmIuiUD-TEITatw0hIdDkyBwIXXCH7oneRoCl7cQAvD_BwE, ComponentLink2Description="Datasheet www", ComponentLink2URL=http://www.onsemi.com/pub/Collateral/BSS123-D.PDF, Date=11.07.2018, ELRAD Id sifra / ELRAD Id No=597778, FIT=0.44, Komp / Device=SMD, Opis / Description="MOSFET BSS123       /N-Channel", Supplier 1=Farnell, Velikost / Size=SOT23
U1: library part "SEN - LIS2DW12TR", "MEMS Accelerometer, Digital, X, Y, Z, ± 2g, ± 4g, ± 8g, ± 16g, 1.62 V, 3.6 V", Case/Package=QFN, Manufacturer="TDK InvenSense", Manufacturer Part Number=MPU-9250, Max Operating Temperature=85°C, Max Supply Voltage=3.6V, Min Operating Temperature=-40°C, Min Supply Voltage=2.4V, Package Quantity=1, Supplier Part Number 1=2849615, ComponentLink1Description=Datasheet, ComponentLink1URL=D:\altium\Altium_Library\Active\Datasheet\LIS2DW12TR.pdf, Height=1mm, Interface=I2C, Length=3.1mm, Mount="Surface Mount", Number of Pins=24, Output Type=SPI, RoHS=Yes, Sensor Type=Accelerometer, Stock 1=0, Supplier 1=Farnell, Width=3.1mm
U2: library part "MCU - CMWX1ZZABZ", "RF Module, FSK, OOK, LoRa, 4.8Kbps, 915MHz, -135.5dBm, 2.2V to 3.6V, I2C, SPI, UART, USB", Manufacturer=Murata, Manufacturer Part Number=CMWX1ZZABZ-091, Supplier Part Number 1=81-CMWX1ZZABZ-091, ComponentLink1Description=Datasheet, ComponentLink1URL=D:\altium\Altium_Library\Active\Datasheet\CMWX1ZZABZ.pdf, Pricing 1="1=11.7, 5=11.06, 10=9.94, 50=9.54, 100=9.14, 250=8.05 (GBP)", Stock 1=175, Supplier 1=Mouser
U3: library part "SEN - APDS-9306-065", "Ambient Light Photo Sensor, Digital I2C Output, 560nm Peak Sensitivity, 1.7V to 3.6V Supply", Case/Package=QFN, Manufacturer="TDK InvenSense", Manufacturer Part Number=MPU-9250, Max Operating Temperature=85°C, Max Supply Voltage=3.6V, Min Operating Temperature=-40°C, Min Supply Voltage=2.4V, Package Quantity=1, Supplier Part Number 1=2908903, ComponentLink1Description=Datasheet, ComponentLink1URL=D:\altium\Altium_Library\Active\Datasheet\APDS-9306.pdf, Height=1mm, Interface=I2C, Length=3.1mm, Mount="Surface Mount", Number of Pins=24, Output Type=SPI, RoHS=Yes, Sensor Type=Accelerometer, Stock 1=0, Supplier 1=Farnell, Width=3.1mm
U4: library part "V_LIN - MCP1810T", "LDO Voltage Regulator, Fixed, 2.5 V to 5.5 V in, 2.5 V/150 mA out, 380 mV drop", DC / DC Converter IC Case=TO-263, Input Voltage Max=45, Input Voltage Min=4.5, Manufacturer="ON SEMICONDUCTOR", Manufacturer Part Number=LM2596DSADJG, Operating Temperature Max=125, Output Current=3, Output Voltage Max=37, Output Voltage Min=1.23, Supplier Part Number 1=2678432, Switching Frequency=150, Automotive Qualification Standard=-, MSL="MSL 1 - Unlimited", No. of Outputs=1, No. of Pins=5, Packaging=Each, Pricing 1="1=1.98, 10=1.49, 100=1.19, 500=1.04, 1000=0.859, 2500=0.785 (GBP)", Product Range=-, RoHS=YES, Stock 1=342, Supplier 1=Farnell, Supplier 2=Mouser, Supplier 3=Digi-Key, Supplier Part Number 2=579-MCP1810T-25I/J8A, Supplier Part Number 3=MCP1810T-25I/J8ADKR-ND, SVHC="No SVHC (12-Jan-2017", Topology="Buck (Step Down)"
U5: library part "RF - HHM22106C1", "Signal Conditioning DIRECTIONAL COUPLER 700-2700MHz", Manufacturer=u-blox, Manufacturer Part Number=MAX-M8Q-0, Supplier Part Number 1=810-HHM22106C1, ComponentLink1Description=Datasheet, ComponentLink1URL=https://eu.mouser.com/datasheet/2/400/f_coupler_hhm22106c1_en-1308651.pdf, Stock 1=10805, Supplier 1=Mouser
U6: library part "RF - LMH2110TMX", "RF Detector IC GSM, EDGE, CDMA 50MHz ~ 8GHz -40dBm ~ 5dBm ±0,5dB", Manufacturer=u-blox, Manufacturer Part Number=MAX-M8Q-0, Supplier Part Number 1=926-LMH2110TMX/NOPB, ComponentLink1Description=Datasheet, ComponentLink1URL=http://www.ti.com/lit/ds/symlink/lmh2110.pdf, Stock 1=10805, Supplier 1=Mouser
U7: library part "RF - PE64102", "RF IC Digitally Tunable Capacitor General Purpose 100MHz ~ 3GHz SPI Interface 12-QFN (2x2)", Manufacturer=u-blox, Manufacturer Part Number=MAX-M8Q-0, Supplier Part Number 1=1046-1066-1-ND, Stock 1=10805, Supplier 1=Digi-Key
U8: library part "SEN - DRV5032FBDBZR", "Board Mount Hall Effect/Magnetic Sensors LP HALL 32FBDBZR", Case/Package=QFN, Manufacturer="TDK InvenSense", Manufacturer Part Number=MPU-9250, Max Operating Temperature=85°C, Max Supply Voltage=3.6V, Min Operating Temperature=-40°C, Min Supply Voltage=2.4V, Package Quantity=1, Supplier Part Number 1=595-DRV5032FBDBZR, ComponentLink1Description=Datasheet, ComponentLink1URL=http://www.ti.com/general/docs/suppproductinfo.tsp?distId=26&gotoUrl=http%3A%2F%2Fwww.ti.com%2Flit%2Fgpn%2Fdrv5032, Height=1mm, Interface=I2C, Length=3.1mm, Mount="Surface Mount", Number of Pins=24, Output Type=SPI, RoHS=Yes, Sensor Type=Accelerometer, Stock 1=0, Supplier 1=Mouser, Width=3.1mm

## Free pads (board coordinates)
  rect 1.2x2.5 smd: 2(28.9,0.8) 3(31.2,0.8) 4(33.5,0.8) 5(35.8,0.8) 6(38.1,0.8) 7(40.4,0.8)
  rect 2.5x2.5 smd: 7(42.85,0.77)
  round 1.5 hole 2.1: 9(7.6,6.3) 9(7.6,12.3)
  round 0.4 hole 0.5: 10(19.8,17.25) 10(23.41,-0.25) 10(37.05,17.25) 11(20.65,17.25) 11(24.26,-0.25) 11(37.9,17.25) 12(21.5,17.25) 12(25.11,-0.25) 12(38.75,17.25)
  round 1.2 hole 0.8: 13(20.957,0) 13(28.894,0) 13(31.199,0) 13(33.497,0) 13(35.795,0) 13(38.1,0) 13(40.401,0) 13(42.801,0)
  round 1.2 hole 0.9: 14(18.67,2.07)

## Via types
v1: diameter 0.4, hole 0.3, Top Layer to Bottom Layer, tented both sides, 136 vias
v2: diameter 0.5, hole 0.3, Top Layer to Bottom Layer, tented both sides, 37 vias
v3: diameter 0.4, hole 0.4, Top Layer to Bottom Layer, tented both sides, 6 vias

## Nets (pads, with @x,y where several pads share a name; then routed paths per layer and width w, separated by ;. In a path a pad name is that pad's centre, name@x,y a point inside that pad or via, vN(x,y) a via of type N, cw(c..) or ccw(c..) an arc to the next point about the centre after c; other vN are vias at no path point)
+2.5V: C4.2 C5.2 C6.2 C7.2 C9.2 C13.1 C14.2 C16.2 C17.2 C18.1 pad.7@40.4,0.8 pad.13@40.401,0 R1.2 R2.2 R4.2 R6.2 R11.1 U1.9 U1.10 U2.4 U2.5 U2.6 U2.32 U4.2 U7.4 U8.1 | length 71.5
  Top Layer w0.3: v2(21.39,2.36) 21.39,4.04 21.02,4.41 C9.2 C17.2 22.77,4.97 25.1,7.3 v2(25.1,8.56) ; v2@26.53,10.32 v2(26.614,10.32) R6.2 27.35,10.32 27.867,10.837 27.867,11.827 28.24,12.2 29.19,12.2 29.41,11.98 ; U4.2 29.41,11.98 ; C16.2 29.75,12.32 29.41,11.98
  Top Layer w0.4: C16.2 36.27,12.32 36.76,11.83 38.39,11.83 39.23,12.67 U8.1 39.82,13.6 40.18,13.96 C4.2 41.07,12.53 40.76,12.22 C5.2 41.89,10.58 C6.2 42.49,10.59 v2(42.79,10.29) 43.26,9.82 43.26,5.94 42.32,5 42.32,3.32 40.4,1.4 pad.7@40.4,1
  Bottom Layer w0.3: U1.9 U1.10 21.92,15.61 23.03,15.61 C13.1 C14.2 23.54,13.7 R1.2 23.54,11.87 ; U7.4 21.043,2.707 v2(21.39,2.36) ; R2.2 21.53,12.02 21.68,11.87 ; R11.1 21.6,11.79 21.68,11.87 ; v2(25.1,8.56) 25.79,9.25 25.79,9.64 ; R4.2 26.614,10.834 v2(26.614,10.32) 27.08,10.32 27.17,10.23 ; U2.32 27.25,10.31 27.17,10.23 ; 21.68,11.87 23.54,11.87 ; 23.54,11.87 23.54,10.325 24.282,9.583 25.008,9.583 25.065,9.64 25.79,9.64 ; 25.79,9.64 C7.2 27.17,10.23
  Bottom Layer w0.4: U2.6 42.54,9.5 42.78,9.74 v2@42.78,10.28 ; U2.5 41.02,10.28 v2@42.78,10.28 ; U2.4 42.41,11.1 42.79,10.72 v2(42.79,10.29) v2@42.78,10.28
A_INT1: U1.12 U2.37 | length 9.6
  Top Layer w0.2: v2(21.96,14.18) 21.995,14.18 22.735,14.92 30.24,14.92 v2(30.68,14.92)
  Bottom Layer w0.2: U1.12 v2@21.93,14.11
  Bottom Layer w0.25: v2@21.93,14.11 21.96,14.14 v2(21.96,14.18)
A_INT2: U1.11 U2.38 | length 11.7
  Top Layer w0.2: v2(22.05,14.91) 22.52,15.38 v2@29.77,15.38
  Bottom Layer w0.2: U1.11 21.71,14.61 22.01,14.91 v2(22.05,14.91) ; v2@29.77,15.38 30.2,15.81 31.25,15.81 31.5,15.56 U2.38
  other v2: 29.77,15.4
ANT: C19.2 CON2.1 pad.14 U7.9 U7.10 | length 6.7
  Bottom Layer w0.75: pad.14 CON2.1@18.67,3.148 ; CON2.1 CON2.1@18.67,3.148 ; C19.2@22.49,5.54 21.697,5.54 20.1,5.54 ccw(c20.1,4.155) 18.715,4.155 18.715,3.193 cw(c18.67,3.193) CON2.1@18.67,3.148
BAT_AN: C12.2 R12.1 R18.2 U2.22 | length 6.8
  Top Layer w0.2: v2(32.29,4.42) 32.69,4.42 32.71,4.44 ; C12.2 32.81,4.54 32.71,4.44 ; R12.1 37.12,3.45 R18.2 35.43,4.1 33.43,4.1 33.09,4.44 32.71,4.44
  Bottom Layer w0.2: v2(32.29,4.42) 32.29,3.687 U2.22@32.31,3.667 ; U2.22 U2.22@32.31,3.667 ; U2.22@32.34,3.697 U2.22@32.31,3.667
BAT_MON_EN: R17.1 U2.45 | length 16.3
  Top Layer w0.2: R17.1 33.87,6.91 35.019,8.059 v2(36.085,8.059)
  Bottom Layer w0.2: v2(36.085,8.059) 38.899,8.059 39.857,9.017 39.857,12.463 38.91,13.41 37.25,13.41 37.09,13.57 U2.45
BOOT0: R3.1 U2.43 | length 0.8
  Top Layer w0.3: v2(35.51,15.58) 35.79,15.58 R3.1
GND: BAT1.1 C1.1 C2.1 C3.1 C4.1 C5.1 C6.1 C7.1 C8.2 C9.1 C10.1 C11.2 C12.1 C13.2 C14.1 C15.1 C16.1 C17.1 C18.2 CON1.5 CON2.2 D1.1 L2.1 pad.7@42.85,0.77 pad.13@20.957,0 pad.13@42.801,0 R3.2 R9.1 R18.1 R19.1 R20.1 T1.1 T2.1 U1.5 U1.6 U1.7 U1.8 U2.3 U2.7 U2.25 U2.27 U2.44 U2.49 U2.50 U2.51 U2.52 U2.53 U2.54 U2.55 U2.56 U2.57 U3.6 U4.0 U4.1 U5.2 U5.5 U6.B2 U6.C1 U7.0 U7.2 U7.5 U7.6 U7.7 U7.8 U7.11 U8.3 | length 84.6
  Top Layer w0.2: v2(3.45,8.02) 10.96,8.02 11.53,7.45 C2.1 ; U4.0 29.725,10.3 ; C16.1 31.02,11.35 U4.1 29.91,10.485 29.725,10.3 ; C15.1 30.66,9.93 30.55,10.04 30.29,10.3 29.725,10.3 ; v2(32.34,1.9) 32.55,2.11 C10.1 ; C12.1 32.81,6.71 32.82,6.72 v1(32.82,7.01) ; v1(35.098,6.605) 35.123,6.58 R19.1 ; C18.2 37.71,10.85 37.83,10.73 U8.3
  Bottom Layer w0.2: CON2.2@17.375,1.718 17.375,4.925 18.89,6.44 22.045,6.44 ; U1.5 U1.6 U1.7 U1.8 ; 21.338,1.718 21.48,1.86 22.27,1.86 C11.2 22.28,1.81 R9.1 v1(21.51,0.71) ; 22.04,6.435 22.045,6.44 ; C3.1 24.61,12.74 24.44,12.91 24.44,13.66 C14.1 24.49,14.1 25.03,14.64 C13.2 ; U6.B2 25.24,2.71 25.51,2.44 v1(25.88,2.44) ; U6.C1 25.69,3.37 v1@26.01,3.37 ; v1@25.89,3.49 v1@26.01,3.37 ; 25.89,6.35 25.98,6.44 ; U5.5@26.19,4.5 26.19,3.55 v1@26.01,3.37 ; U5.2@26.19,5.5 26.19,6.4 v1@26.23,6.44 ; C7.1 27.17,6.47 27.2,6.44 ; U2.56@34.693,7.01 v1(35.098,6.605) ; 40.48,1.51 41.21,1.51 41.37,1.35 41.85,1.35 ; U2.7 42.26,8.71 42.75,8.71 43.44,8.02 43.44,4.306 BAT1.1@43.446,4.3 ; U2.3 42.78,11.9 43.44,12.56 43.44,14.294 BAT1.1@43.446,14.3 ; 22.045,6.44 24.59,6.44 25.89,6.44 25.98,6.44 ; 25.98,6.44 v1@26.23,6.44 ; v1@26.01,3.37 26.38,3.37 26.53,3.52 26.75,3.52 27.56,3.52 27.61,3.47 27.88,3.47 28.115,3.47 28.134,3.489 28.529,3.489 28.548,3.47 28.63,3.47 29.198,4.038 U2.25 29.798,4.705 30.114,5.021 30.134,5.021 30.275,5.162 30.275,5.85 29.967,6.158 29.348,6.158 U2.27 29.17,6.28 28.03,6.28 27.95,6.36 27.87,6.44 27.41,6.44 27.2,6.44 ; v1@26.23,6.44 26.79,6.44 27.2,6.44
  Bottom Layer w0.5: U2.57 v1(35.098,6.605) ; U2.53 35.098,9.068 35.09,9.06 35.29,8.86 37.353,8.86 U2.52 U2.49
  other v1: 44.12,0.43 19.94,0.59 17.71,0.61 18.44,0.61 19.15,0.61 44.15,0.99 44.15,1.62 44.09,2.35 38.81,2.38 30.11,2.42 30.71,2.41 34.16,2.42 39.4,2.41 39.99,2.41 40.56,2.41 24.84,2.459 26.71,2.46 43.85,2.94 28.66,3.07 40.59,3.12 28.16,3.38 26.75,3.44 29.11,3.43 26.04,3.45 40.26,3.73 39.36,5.08 39.36,5.63 42.26,5.72 43.85,5.92 39.36,6.14 42.26,6.31 26.79,6.36 26.23,6.39 27.41,6.4 27.98,6.39 36.55,6.64 39.36,6.66 42.26,6.89 43.85,7.11 39.33,7.2 42.26,7.48 36.6,7.57 39,7.61 32.67,8.02 33.22,8.02 33.78,8.02 34.33,8.02 42.26,8.07 16.86,8.29 43.85,8.3 22.88,8.53 23.69,8.53 20.18,8.56 21.01,8.57 22.11,8.55 24.33,8.56 30.49,8.6 17.5,8.64 19.42,8.65 42.26,8.65 16.86,8.9 26.41,9.09 33.86,9.15 30.55,9.35 16.86,9.5 43.88,9.49 27.92,9.77 33.87,9.78 17.42,9.99 30.54,10.03 24.48,10.06 19.44,10.08 25.11,10.16 25.86,10.29 34.74,10.35 35.3,10.35 18.02,10.4 18.88,10.39 32.13,10.38 32.74,10.38 33.36,10.38 34.09,10.38 30.56,10.66 43.88,10.68 25.34,10.74 33.84,11.09 33.84,11.72 43.88,11.87 27.36,12.42 24.69,13.01 25.23,13.01 25.81,13.01 24.16,13.02 43.88,13.06 30.7,13.08 31.23,13.09 31.75,13.09 17.84,13.34 16.88,13.4 27.64,14.49 28.26,14.49 28.89,14.49 29.5,14.49 30.11,14.49 43.88,15.45 19.125,15.85 43.88,16.04 21.02,16.61 21.85,16.63 23.03,16.63 24.22,16.63 25.42,16.63 26.61,16.63 27.8,16.63 28.99,16.63 30.18,16.63 31.37,16.63 32.56,16.63 33.75,16.63 34.94,16.63 36.13,16.63 37.32,16.63 38.51,16.63 39.7,16.63 40.9,16.63 42.09,16.63 43.28,16.63
GPS_EN: pad.3 pad.13@31.199,0 U2.39 | length 28.4
  Top Layer w0.25: pad.3@31.2,1 31.2,2.41 32.15,3.36 33.9,3.36 34.68,2.58 38.36,2.58 38.87,3.09 38.87,7.05 38.42,7.5 38.42,9.084 39.268,9.932 39.27,9.93 39.34,10 v2(39.38,10)
  Bottom Layer w0.22: U2.39 32.29,13.52 32.54,13.27 36.47,13.27 36.755,12.985 38.535,12.985 38.95,12.57 38.95,10.43 v2(39.38,10)
GPS_RX: pad.6 pad.13@38.1,0 U2.18 | length 4
  Bottom Layer w0.2: U2.18 35.498,2.752 35.73,2.52 37.094,2.52 v1(38.08,1.534)
GPS_TX: pad.5 pad.13@35.795,0 U2.19 | length 2.5
  Bottom Layer w0.2: U2.19 34.698,2.632 35.57,1.76 v1(35.81,1.76)
LED: R5.1 U2.33 | length 14.6
  Top Layer w0.2: v2@17.88,12.01 v2(17.88,12.08) 18.22,12.08 18.317,11.983 18.317,10.953 18.46,10.81 18.696,10.81 18.703,10.817 19.057,10.817 19.064,10.81 19.121,10.81 20.161,11.85 25.06,11.85 v2(25.88,11.03) v2@25.767,10.917
  Bottom Layer w0.2: v2(17.88,12.08) 18.39,12.59 R5.1 ; v2(25.88,11.03) 25.899,11.03 25.919,11.01 26.276,11.367 27.333,11.367 27.59,11.11 U2.33
LIGHT_PW: C8.1 U2.40 U3.3 | length 16.2
  Top Layer w0.25: U3.3 18.97,14.9 19.1,15.03 C8.1 21.17,15.03 21.872,15.732 29.192,15.732 29.41,15.95 30.13,15.95 30.59,15.49 v2(33.09,15.49)
  Bottom Layer w0.25: U2.40 v2(33.09,15.49)
LORA_ANT: C19.1 L2.2 U5.1 | length 1.6
  Bottom Layer w0.75: C19.1@23.775,5.54 U5.1@25.4,5.54
NetC11_1: C11.1 T1.3 U6.A1 | length 3.7
  Bottom Layer w0.2: T1.3@24.39,1.83 C11.1 23.26,2.36 23.97,3.07 24.248,3.07 24.475,3.297 24.487,3.297 24.56,3.37 U6.A1
NetCON1_1: CON1.1 R11.2 | length 17.3
  Bottom Layer w0.152: CON1.1 3.5,10.68 10.6,10.68 11.05,11.13 R11.2
NetCON1_2: CON1.2 R10.1 | length 16.4
  Top Layer w0.152: v2(2.2,10.65) 10.56,10.65 11.01,11.1 16.41,11.1 17.35,12.04 R10.1
NetCON1_3: CON1.3 R13.2 | length 18.1
  Bottom Layer w0.152: CON1.3 3.53,9.32 15.55,9.32 17.081,10.851 19.789,10.851 R13.2
NetCON1_4: CON1.4 R14.1 | length 16.7
  Top Layer w0.152: v2(2.21,9.39) 2.28,9.32 15.08,9.32 17.16,11.4 R14.1 R14.1@17.84,11.6
NetCON1_6: CON1.6 R15.1 | length 20.5
  Bottom Layer w0.152: CON1.6 2.88,7.43 2.88,6.33 3.35,5.86 4.59,5.86 6.53,7.8 10.73,7.8 11.01,7.52 16.96,7.52 17.36,7.92 R15.1